# Altium PCB MCH_MAIN.PCBDOC (part 3 of 5)
Units mil, origin at the board's own origin, x right, y up, seen from the top; angles counter-clockwise.
Board outline 7194.88 x 2984.25 mil, 8 copper layers (Top Layer, MidLayer1, MidLayer2, GND, Power, MidLayer3, MidLayer4, Bottom Layer); 584 components, 952 nets, 3896 pads, 365 vias.
Unrouted connection lines stored in the file: 2112.
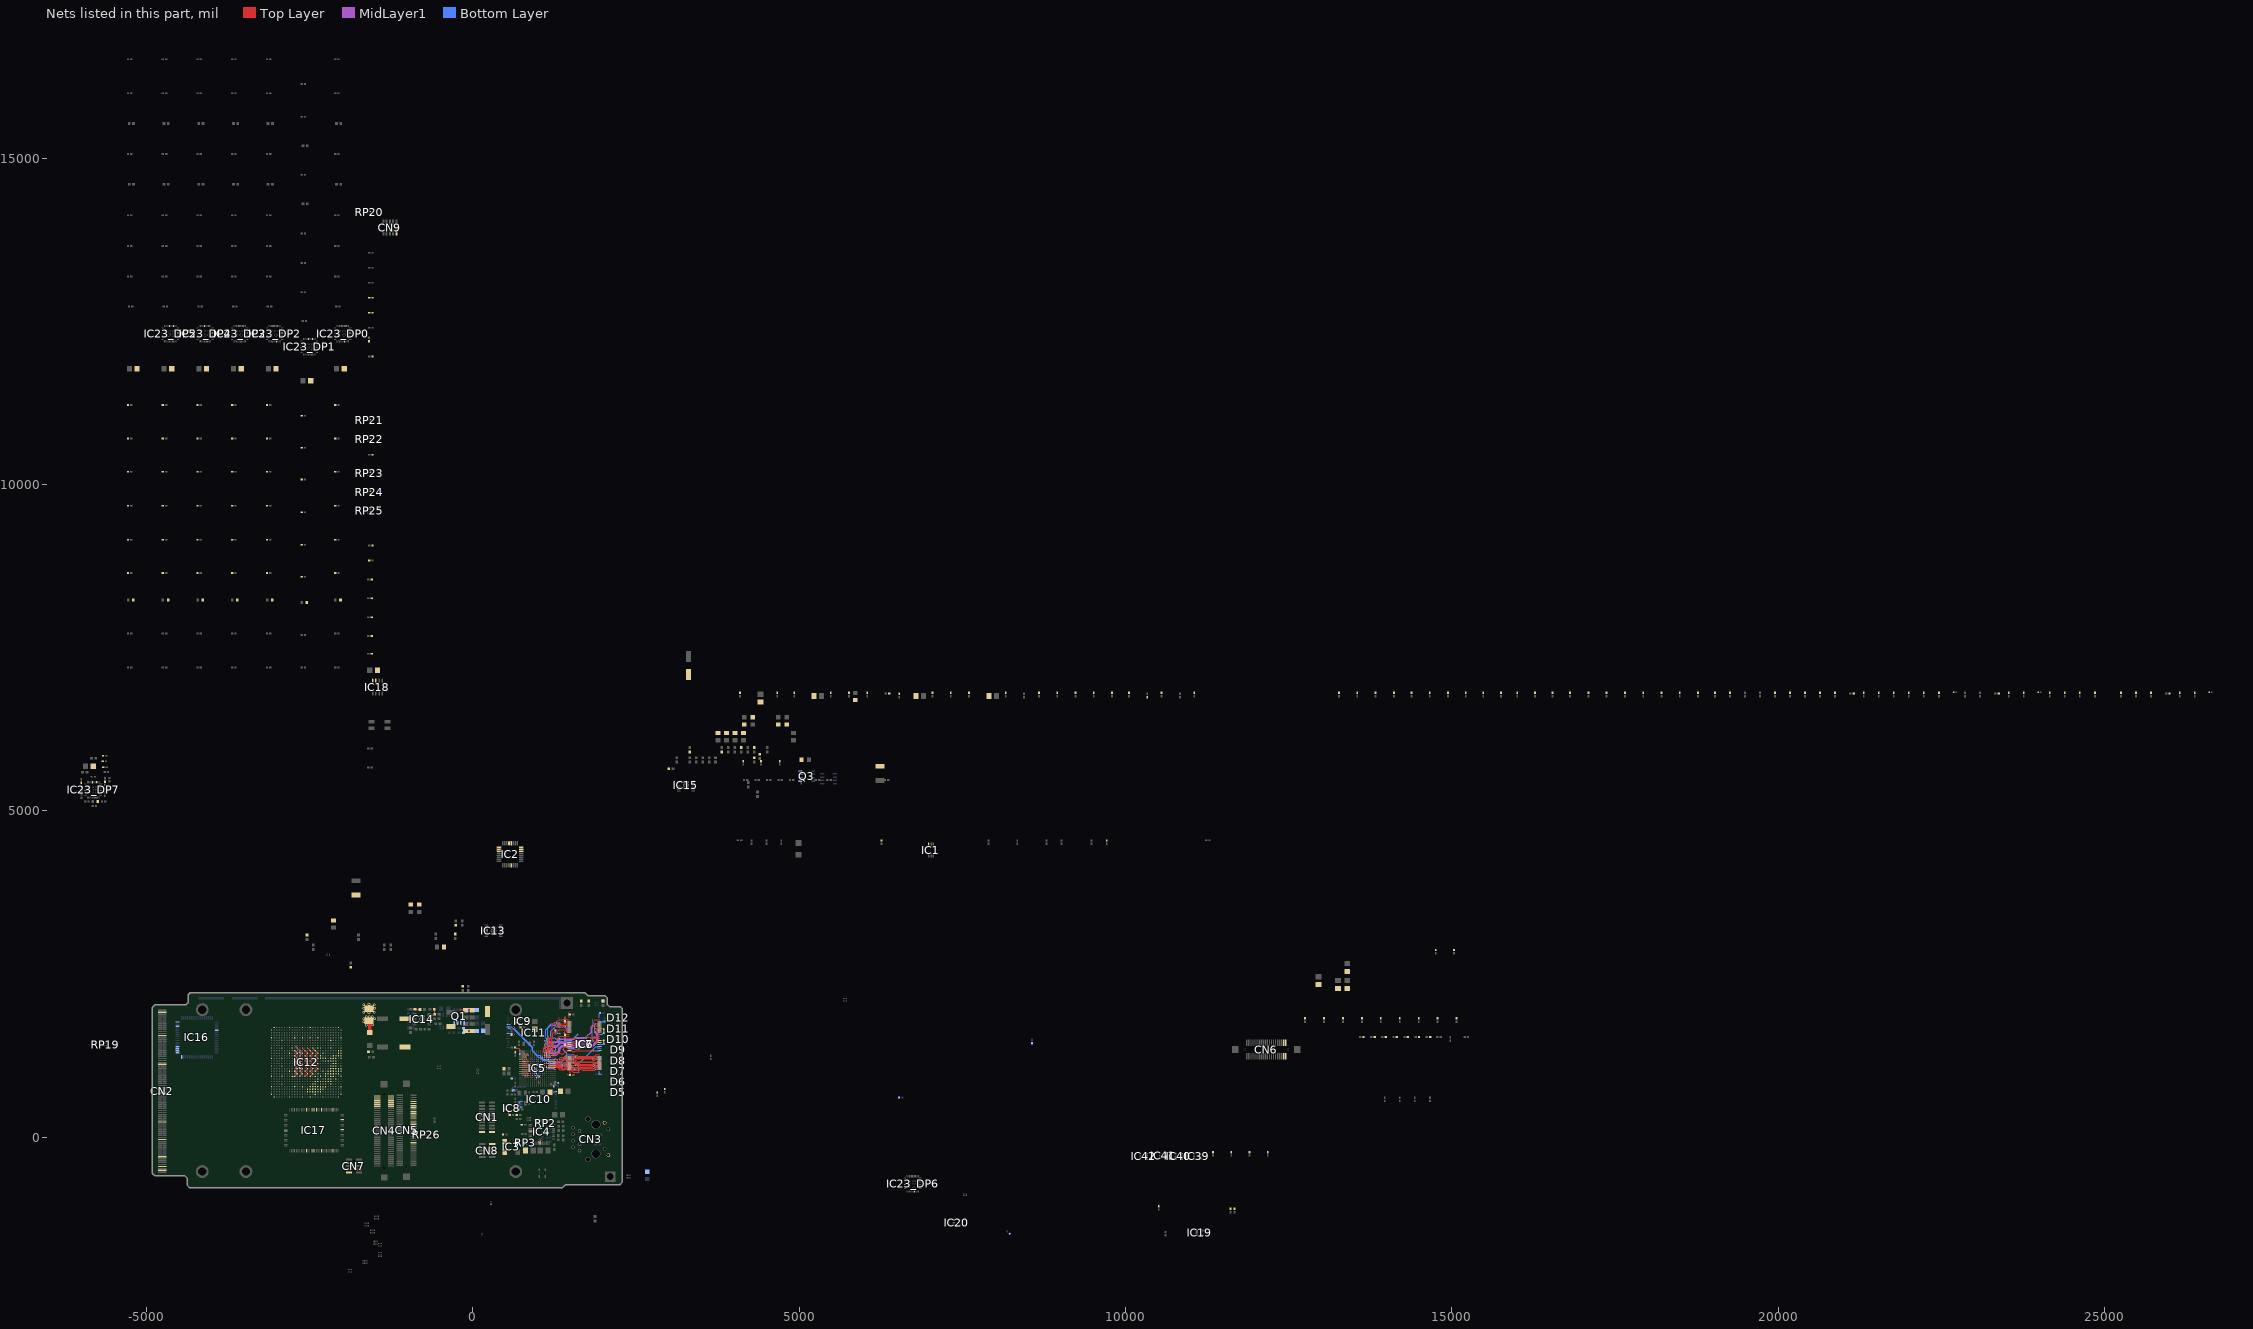
[diagram p6: the nets of this part, all layers, seen from the top]

## Part data
C1 C2 C3 C4 C5 C6 C7 C8 C9 C10 C13 C15 C16 C17 C18 C19 C20 C21 C22 C23 C24 C25 C26 C27 C28 C29 C30 C31 C32 C33 C34 C35 C36 C37 C38 C39 C40 C41 C42 C43 C44 C45 C46 C47 C48 C49 C50 C51 C52 C53 C54 C55 C56 C57 C58 C59 C60 C65 C66 C67 C68 C69 C70 C71 C72 C73 C74 C75 C76 C77 C78 C80 C81 C82 C83 C84 C85 C86 C87 C88 C89 C90 C91 C92 C93 C94 C95 C96 C97 C98 C99 C100 C101 C102 C103 C104 C105 C106 C107 C110 C111 C112 C113 C114 C115 C116 C117 C126 C127 C128 C129 C130 C131 C132 C133 C134 C135 C136 C137 C138 C139 C140 C141 C142 C143 C144 C145 C146 C152 C153 C154 C156 C157 C158 C160 C161 C163 C164 C165 C166 C167 C168 C169 C170 C171 C172 C175 C176 C177 C178 C179 C180 C181 C182 C183 C184 C185 C186 C187 C188 C189 C190 C191 C192 C193 C194 C195 C196 C197 C199 C201 C202 C203 C204 C205 C206 C207 C208 C209 C210 C211 C212 C216 C217 C218 C219 C220 C221 C222 C223 C224 C225 C227 C228 C229 C230 C231 C232 C233 C234 C235 C236 C237 C238 C239 C240 C252: "Capacitor"
C11 C12 C14 C79_DP0 C79_DP1 C79_DP2 C79_DP3 C79_DP4 C79_DP5 C79_DP6 C79_DP7 C147 C155 C159 C162 C226 C241 C242 C243 C244 C245 C246 C247: "Tantallum capacitor"
C61_DP0 C61_DP1 C61_DP2 C61_DP3 C61_DP4 C61_DP5 C61_DP6 C61_DP7 C62_DP0 C62_DP1 C62_DP2 C62_DP3 C62_DP4 C62_DP5 C62_DP6 C62_DP7 C63_DP0 C63_DP1 C63_DP2 C63_DP3 C63_DP4 C63_DP5 C63_DP6 C63_DP7 C64_DP0 C64_DP1 C64_DP2 C64_DP3 C64_DP4 C64_DP5 C64_DP6 C64_DP7 C108_DP0 C108_DP1 C108_DP2 C108_DP3 C108_DP4 C108_DP5 C108_DP6 C108_DP7 C109_DP0 C109_DP1 C109_DP2 C109_DP3 C109_DP4 C109_DP5 C109_DP6 C109_DP7 C118_DP0 C118_DP1 C118_DP2 C118_DP3 C118_DP4 C118_DP5 C118_DP6 C118_DP7 C119_DP0 C119_DP1 C119_DP2 C119_DP3 C119_DP4 C119_DP5 C119_DP6 C119_DP7 C120_DP0 C120_DP1 C120_DP2 C120_DP3 C120_DP4 C120_DP5 C120_DP6 C120_DP7 C121_DP0 C121_DP1 C121_DP2 C121_DP3 C121_DP4 C121_DP5 C121_DP6 C121_DP7 C122_DP0 C122_DP1 C122_DP2 C122_DP3 C122_DP4 C122_DP5 C122_DP6 C122_DP7 C123_DP0 C123_DP1 C123_DP2 C123_DP3 C123_DP4 C123_DP5 C123_DP6 C123_DP7 C124_DP0 C124_DP1 C124_DP2 C124_DP3 C124_DP4 C124_DP5 C124_DP6 C124_DP7 C125_DP0 C125_DP1 C125_DP2 C125_DP3 C125_DP4 C125_DP5 C125_DP6 C125_DP7 C148 C149 C150 C151 C250 C251: library part Cap, "Capacitor"
C213 C214 C215 C249: "Polarized Capacitor (Radial)"
CN1: library part "CONN_2x10 1.27", "1.27 mm dual row goldpin"
CN2: "microTCA MTCA.0 standard MCH connector 1"
CN3: library part ETH_J0011D21BNL, "RJ45 with magnetics and LEDs (Kamami, Kristech,Mouser)"
CN4 CN5: library part KX15_70p, "multipin B2B connector (plug)"
CN6: library part KX15_40p, "multipin B2B connector (plug)"
CN7 CN8 CN9: library part "CONN_2x5 1.27", "1.27 mm dual row goldpin"
CN10: library part "CONN_1x2 1.27", "1.27 mm dual row goldpin"
D1 D2 D3 D4: library part LED0, "Chip LED (any color)"
D5 D6 D7 D8 D9 D10 D11 D12: library part LED_2_colour
D13 D14 D18 D20 D21: "Schottky Diode"
D15 D16 D19: library part LED0, "Red chip LED"
D17: library part D_TRANSIL_SMD_0.6KW, "transil 600W"
F1: "polymer FUSE"
IC1: "ONSemi LVDS/LVPECL -> LVTTL/LVCMOS buffer"
IC2: "1:16 LVCMOS fanout"
IC3: library part OSC_CFPS-73, "SMD oscillator 3.3V (Elfa)"
IC4: library part IFC_DM9161AE, "Davicom 100Mbps ethernet PHY"
IC5: library part AT91SAM9263, "Atmel ARM926 MCU"
IC6 IC7: "Micron 256Mbit PC133 SDRAM w/16-bit data bus"
IC8 IC9: "TI single OR gate"
IC10: "serial data FLASH"
IC11: "256 MByte 8-bit NAND flash"
IC12: library part EP3C120F780C7, "Cyclone III Family FPGA, 531 I/O Pins, 4 PLLs, 780-Pin FBGA, Speed Grade 7, Commercial Grade"
IC13: "National Semiconductor 3A integrated synchronous buck converter"
IC14 IC15: "TI synchronous buck controller"
IC16: "8-Bit AVR Microcontroller with 128K Bytes of In-System Programmable Flash Memory"
IC17: "4.5 Mbit ZBT SRAM"
IC18: library part MEM_24C16, "Serial 16K EEPROM"
IC19: "TTL->LVDS buffer"
IC20: "LVDS->TTL buffer"
IC23_DP0 IC23_DP1 IC23_DP2 IC23_DP3 IC23_DP4 IC23_DP5 IC23_DP6 IC23_DP7: "Texas Instruments Gigabit Ethernet PHY with deterministic clocking and LVPECL output interface"
IC39 IC40 IC41 IC42: "I2C temp. sensor"
L1 L2 L8: library part L_IHLP2525_0.68u, "Vishay 16A 2.2u inductor"
L3 L4 L5_DP0 L5_DP1 L5_DP2 L5_DP3 L5_DP4 L5_DP5 L5_DP6 L5_DP7 L6 L7 L9 L10: "Ferrite bead"
Q1 Q2 Q3 Q4: "18A 8mOhm N-Channel MOSFET"
R1 R2 R3 R4 R5 R6 R7 R8 R9 R10 R11 R12 R13 R14 R15 R16 R17 R18 R19 R20 R21 R22 R23 R24 R25 R26 R27 R28 R29 R30 R31 R32 R33 R34 R35 R36 R37 R38 R39_DP0 R39_DP1 R39_DP2 R39_DP3 R39_DP4 R39_DP5 R39_DP6 R39_DP7 R40_DP0 R40_DP1 R40_DP2 R40_DP3 R40_DP4 R40_DP5 R40_DP6 R40_DP7 R41 R42 R43 R44 R45 R46 R47 R48 R49 R50 R51 R52 R53 R54 R55 R56 R57 R58 R59 R60 R61_DP0 R61_DP1 R61_DP2 R61_DP3 R61_DP4 R61_DP5 R61_DP6 R61_DP7 R62 R63 R64 R65 R66 R67 R68 R69 R70 R71 R72 R73 R74 R75 R76 R77 R78 R79 R80 R81 R82 R83 R84 R85 R86 R87 R88 R89 R90 R91 R92 R93 R94 R95: "Resistor"
RP1 RP2 RP3 RP4 RP5 RP6 RP7 RP8 RP9 RP10 RP11 RP12 RP13 RP14 RP15 RP16 RP17 RP18 RP19 RP20 RP21 RP22 RP23 RP24 RP25 RP26 RP28: library part Res_Pack4, "4-resistor pack"
S1: library part uTCA_HOTSWAP_SWITCH, "Push button"
X1: library part X_CRYSTAL_SMD_ABM8, "Miniature crystal oscillator (ABRACON)"
X2: library part X_CRYSTAL_32k_SMD, "Crystal oscillator"
X3: library part X_CRYSTAL_SMD_ABM3, "Miniature crystal oscillator (ABRACON)"

## Free pads (board coordinates)
  rect 393.7x39.37 smd far side: ESD_STRIP_SEGMENT_1(-4006.3,2130.51) ESD_STRIP_SEGMENT_2(-3494.49,2130.51)
  rect 4685.04x39.37 smd far side: ESD_STRIP_SEGMENT_3(-837.01,2130.51)
  rect 39.37x185.04 smd far side: ESD_STRIP_SEGMENT_3(1338.19,2057.68)
  rect 185.04x185.04 hole 106.3: ESD_STRIP_SEGMENT_3(1446.46,2057.68)
  round 196.85 hole 125.98 unplated: ""(-4144.09,-525) ""(-4144.09,1955.31) ""(-3474.8,-525) ""(-3474.8,1955.31) ""(659.06,-525) ""(659.06,1955.31)
  rect 157.48x157.48 hole 106.3: ""(2105.91,-603.74)

## Via types
v1: diameter 24, hole 8, Top Layer to Bottom Layer, 183 vias
v2: diameter 18, hole 8, Top Layer to Bottom Layer, 150 vias
v3: diameter 40, hole 24, Top Layer to Bottom Layer, 24 vias
v4: diameter 26, hole 10, Top Layer to Bottom Layer, 8 vias

## Nets (pads, with @x,y where several pads share a name; then routed paths per layer and width w, separated by ;. In a path a pad name is that pad's centre, name@x,y a point inside that pad or via, vN(x,y) a via of type N, cw(c..) or ccw(c..) an arc to the next point about the centre after c; other vN are vias at no path point)
+1V2: C37.1 C39.1 C65.2 C66.2 C68.2 C70.2 C72.2 C74.2 C76.2 C77.2 C78.2 C80.2 C81.2 C84.2 C86.2 C88.2 C90.2 C92.2 C94.2 C95.2 C98.2 C99.2 C100.2 C102.2 C104.2 C106.2 C110.2 C111.2 C113.2 C114.2 C116.2 C117.2 C127.2 C128.2 C130.2 C131.2 C132.2 C133.2 C134.2 C136.2 C141.2 C142.2 C143.2 C144.2 C147.1 C155.1 C159.1 C170.2 C171.2 C172.2 C242.1 C243.1 C252.1 IC5.A16 IC5.H10 IC5.V1 IC12.J9 IC12.J20 IC12.K9 IC12.K11 IC12.K13 IC12.K15 IC12.K17 IC12.K19 IC12.L10 IC12.L12 IC12.L14 IC12.L16 IC12.L18 IC12.L20 IC12.M9 IC12.M11 IC12.M13 IC12.M15 IC12.M17 IC12.M19 IC12.N10 IC12.N12 IC12.N14 IC12.N16 IC12.N18 IC12.N20 IC12.P9 IC12.P11 IC12.P13 IC12.P15 IC12.P17 IC12.P19 IC12.R10 IC12.R12 IC12.R14 IC12.R16 IC12.R18 IC12.R20 IC12.T9 IC12.T11 IC12.T13 IC12.T15 IC12.T17 IC12.T19 IC12.U10 IC12.U12 IC12.U14 IC12.U16 IC12.U18 IC12.U20 IC12.V9 IC12.V11 IC12.V13 IC12.V15 IC12.V17 IC12.V19 IC12.W10 IC12.W12 IC12.W14 IC12.W16 IC12.W18 IC12.W20 IC12.Y9 IC12.Y20 IC16.49 L8.2 R62.1 | length 3148
  Top Layer w8: IC12.Y20@-2767.01,933.74 IC12.W20@-2727.64,933.74 IC12.V19@-2688.27,973.11 IC12.W18@-2727.64,1012.48 IC12.V17@-2688.27,1051.85 IC12.W16@-2727.64,1091.22 IC12.V15@-2688.27,1130.59 IC12.W14@-2727.64,1169.96 IC12.V13@-2688.27,1209.33 IC12.W12@-2727.64,1248.7 IC12.V11@-2688.27,1288.07 ; IC12.W10@-2727.64,1322.56 IC12.W10@-2727.64,1327.44 IC12.V11@-2688.27,1288.07 ; IC12.V11@-2691.26,1288.07 IC12.V11@-2688.27,1288.07 ; IC12.V9@-2688.27,1366.81 -2670.08,1348.62 ; -2669.29,1345.47 -2669.29,1349.41 ; -2668.11,1346.65 IC12.T11@-2609.53,1288.07 IC12.U12@-2648.9,1248.7 IC12.T13@-2609.53,1209.33 IC12.U14@-2648.9,1169.96 IC12.T15@-2609.53,1130.59 IC12.U16@-2648.9,1091.22 IC12.T17@-2609.53,1051.85 IC12.U18@-2648.9,1012.48 IC12.T19@-2609.53,973.11 IC12.U20@-2648.9,933.74 ; IC12.T9@-2609.53,1366.81 IC12.R10@-2570.16,1327.44 IC12.P11@-2530.79,1288.07 IC12.R12@-2570.16,1248.7 IC12.P13@-2530.79,1209.33 IC12.R14@-2570.16,1169.96 IC12.P15@-2530.79,1130.59 IC12.R16@-2570.16,1091.22 IC12.P17@-2530.79,1051.85 IC12.R18@-2570.16,1012.48 IC12.P19@-2530.79,973.11 IC12.R20@-2570.16,933.74 ; IC12.P9@-2530.79,1366.81 IC12.N10@-2491.42,1327.44 ; IC12.N20@-2491.42,933.74 IC12.M19@-2452.05,973.11 IC12.N18@-2491.42,1012.48 IC12.M17@-2452.05,1051.85 IC12.N16@-2491.42,1091.22 IC12.M15@-2452.05,1130.59 IC12.N14@-2491.42,1169.96 IC12.M13@-2452.05,1209.33 IC12.N12@-2491.42,1248.7 IC12.M11@-2452.05,1288.07 ; IC12.N10@-2491.42,1322.56 IC12.N10@-2491.42,1327.44 ; IC12.M11@-2455.04,1288.07 IC12.M11@-2452.05,1288.07 ; IC12.M9@-2452.05,1366.81 IC12.L10@-2412.68,1327.44 IC12.K11@-2373.31,1288.07 IC12.L12@-2412.68,1248.7 IC12.K13@-2373.31,1209.33 IC12.L14@-2412.68,1169.96 IC12.K15@-2373.31,1130.59 IC12.L16@-2412.68,1091.22 IC12.K17@-2373.31,1051.85 IC12.L18@-2412.68,1012.48 ; C37.1@646.02,1376.1 652.44,1376.1 665.35,1363.19 704.72,1363.19 723.41,1344.51 IC5.V1@723.41,1321.86 ; IC5.H10@1038.37,1038.39 v2(1054.11,1022.65) ; IC5.A16@1258.84,849.42 v2@1282.47,849.42 ; IC12.N10@-2491.42,1327.44 IC12.M11@-2452.05,1288.07
  Bottom Layer w8: v2(1054.11,1022.65) 1074.81,1022.65 C252.1@1086.61,1034.45
  other v1: -2708.66,993.11 -2629.92,993.11 -2708.66,1069.88 -2629.92,1071.85 -2627.95,1148.62 -2708.66,1150.59 -2627.95,1227.36 -2708.66,1229.33 -2708.66,1308.07 -2627.95,1308.07 -2708.66,1386.81
  other v2: 1283.46,849.41
+2V5: C1.2 C2.2 C3.2 C4.2 C67.2 C69.2 C71.2 C73.2 C75.2 C79_DP0.1 C79_DP1.1 C79_DP2.1 C79_DP3.1 C79_DP4.1 C79_DP5.1 C79_DP6.1 C79_DP7.1 C118_DP0.2 C118_DP1.2 C118_DP2.2 C118_DP3.2 C118_DP4.2 C118_DP5.2 C118_DP6.2 C118_DP7.2 C119_DP0.2 C119_DP1.2 C119_DP2.2 C119_DP3.2 C119_DP4.2 C119_DP5.2 C119_DP6.2 C119_DP7.2 C120_DP0.2 C120_DP1.2 C120_DP2.2 C120_DP3.2 C120_DP4.2 C120_DP5.2 C120_DP6.2 C120_DP7.2 C121_DP0.2 C121_DP1.2 C121_DP2.2 C121_DP3.2 C121_DP4.2 C121_DP5.2 C121_DP6.2 C121_DP7.2 C122_DP0.2 C122_DP1.2 C122_DP2.2 C122_DP3.2 C122_DP4.2 C122_DP5.2 C122_DP6.2 C122_DP7.2 C123_DP0.2 C123_DP1.2 C123_DP2.2 C123_DP3.2 C123_DP4.2 C123_DP5.2 C123_DP6.2 C123_DP7.2 C135.2 C137.2 C138.2 C139.2 C140.2 C145.2 C146.2 C152.2 C153.2 C154.2 C156.2 C157.2 C158.2 C160.2 C161.2 C163.2 C164.2 C165.2 C175.1 C176.1 C177.1 C178.1 C179.1 C183.2 C184.2 C185.2 C186.2 C187.2 C213.1 C244.1 C245.1 CN4.9 CN4.10 CN4.11 CN4.12 IC2.1 IC2.2 IC2.3 IC2.22 IC2.23 IC2.24 IC2.28 IC2.29 IC12.A2 IC12.A5 IC12.A9 IC12.A13 IC12.AA1 IC12.AA11 IC12.AA18 IC12.AD6 IC12.AD9 IC12.AD13 IC12.AD16 IC12.AD20 IC12.AD23 IC12.AG1 IC12.AH2 IC12.AH5 IC12.AH9 IC12.AH13 IC12.AH16 IC12.AH20 IC12.AH24 IC12.AH27 IC12.B1 IC12.E6 IC12.E9 IC12.E13 IC12.H1 IC12.H11 IC12.K5 IC12.N1 IC12.N5 IC12.T1 IC12.T5 IC12.W5 IC16.48 IC23_DP0.6 IC23_DP0.13 IC23_DP0.16 IC23_DP0.26 IC23_DP0.37 IC23_DP1.6 IC23_DP1.13 IC23_DP1.16 IC23_DP1.26 IC23_DP1.37 IC23_DP2.6 IC23_DP2.13 IC23_DP2.16 IC23_DP2.26 IC23_DP2.37 IC23_DP3.6 IC23_DP3.13 IC23_DP3.16 IC23_DP3.26 IC23_DP3.37 IC23_DP4.6 IC23_DP4.13 IC23_DP4.16 IC23_DP4.26 IC23_DP4.37 IC23_DP5.6 IC23_DP5.13 IC23_DP5.16 IC23_DP5.26 IC23_DP5.37 IC23_DP6.6 IC23_DP6.13 IC23_DP6.16 IC23_DP6.26 IC23_DP6.37 IC23_DP7.6 IC23_DP7.13 IC23_DP7.16 IC23_DP7.26 IC23_DP7.37 L1.2 L3.1 L5_DP0.1 L5_DP1.1 L5_DP2.1 L5_DP3.1 L5_DP4.1 L5_DP5.1 L5_DP6.1 L5_DP7.1 L6.1 L7.1 L10.1 R19.1 R21.2 R22.2 R67.1 R68.2 R70.1 | length 285.9
  Top Layer w10: -208.67,1956.91 C176.1@-124.23,1956.91
  Top Layer w32: C185.2@-109.25,1629.92 -107.65,1628.32 C184.2@-10.67,1628.32 ; C176.1@-106.79,1946.35 C175.1@-8.27,1946.35 ; C175.1@-6.89,1946.85 C175.1@-4.28,1944.24
+3V3: C5.2 C6.2 C7.2 C8.1 C14.1 C15.1 C17.1 C19.1 C22.1 C23.1 C24.1 C25.1 C26.1 C28.1 C30.1 C35.1 C42.1 C43.1 C44.1 C45.1 C46.1 C47.1 C48.1 C49.1 C50.1 C51.1 C52.1 C53.1 C54.1 C55.1 C56.1 C57.1 C58.1 C59.1 C60.1 C85.2 C87.2 C89.2 C91.2 C93.2 C101.2 C103.2 C105.2 C107.2 C112.2 C115.2 C126.2 C129.2 C148.2 C149.2 C150.2 C151.2 C162.1 C168.2 C169.2 C201.2 C202.2 C203.2 C204.2 C205.2 C207.1 C208.1 C209.1 C210.1 C211.1 C229.2 C230.2 C231.2 C232.2 C233.2 C234.2 C235.2 C236.2 C237.2 C238.2 C239.2 C240.2 C241.1 C246.1 C247.1 C249.1 C250.2 C251.2 CN1.1 CN1.2 CN3.9 CN3.12 CN4.5 CN4.6 CN4.7 CN4.8 CN6.1 CN6.2 CN6.3 CN6.4 CN7.2 CN8.2 D1.1 D2.1 D3.1 D4.1 D5.3 D6.3 D7.3 D8.3 D9.3 D10.3 D11.3 D12.3 D21.1 IC1.8 IC2.13 IC3.1 IC3.4 IC4.23 IC4.30 IC4.41 IC5.A17 IC5.C17 IC5.H8 IC5.K10 IC5.K12 IC5.L8 IC5.L9 IC5.L10 IC5.L11 IC5.M10 IC5.M13 IC5.T1 IC5.T2 IC6.1 IC6.3 IC6.9 IC6.14 IC6.27 IC6.43 IC6.49 IC7.1 IC7.3 IC7.9 IC7.14 IC7.27 IC7.43 IC7.49 IC8.5 IC9.5 IC10.2 IC10.6 IC10.16 IC11.12 IC11.19 IC11.37 IC12.A16 IC12.A20 IC12.A24 IC12.A27 IC12.AA28 IC12.AG28 IC12.B28 IC12.E16 IC12.E20 IC12.E23 IC12.H18 IC12.H28 IC12.K24 IC12.N24 IC12.N28 IC12.T24 IC12.T28 IC12.W24 IC13.6 IC13.7 IC13.12 IC17.4 IC17.11 IC17.14 IC17.15 IC17.16 IC17.20 IC17.27 IC17.41 IC17.54 IC17.61 IC17.65 IC17.66 IC17.70 IC17.77 IC17.91 IC17.97 IC19.1 IC20.1 IC39.4 IC40.3 IC40.4 IC41.3 IC41.4 IC41.5 IC42.4 IC42.5 L2.2 L9.1 R25.2 R28.1 R32.2 R35.2 R36.2 R37.2 R60.2 R77.1 R78.2 R81.1 R87.1 RP2.1 RP2.2 RP2.3 RP3.1 RP3.2 RP3.3 RP3.4 RP26.5 RP26.6 RP26.7 RP26.8 | length 3392.6
  Top Layer w8: C57.1@490.43,430.51 526.38,430.51 IC8.5@548.19,408.7 548.19,357.76 R35.2@564.84,341.1 ; C60.1@601.69,1574.65 604.49,1571.85 v1(625.98,1571.85) ; C43.1@651.69,1754.65 702.64,1754.65 IC9.5@719.45,1737.83 719.45,1696.89 R36.2@736.1,1680.24 ; C56.1@704.84,426.1 704.84,468.62 708.65,472.43 v1(708.65,468.5) ; v2(770.67,1306.1) IC5.T2@786.4,1290.36 ; IC4.30@881.12,93.94 921.69,93.94 937.01,109.25 v1(937.01,125) ; v2(896.63,928.16) IC5.M13@912.38,943.9 ; IC5.M10@912.38,1038.39 IC5.L10@943.88,1038.39 ; v2(928.13,991.15) IC5.L11@943.88,1006.9 ; v2(928.13,1022.65) IC5.L10@943.88,1038.39 ; v2@928.15,1053.15 943.88,1068.88 IC5.L9@943.88,1069.89 IC5.L9@941.63,1072.14 ; v2@930.09,1085.64 930.09,1082.7 IC5.L9@943.39,1069.4 ; v2@930.09,1087.6 IC5.L8@943.88,1101.39 IC5.L8@941.63,1099.11 ; v2(959.63,959.65) IC5.K12@975.37,975.4 ; IC4.23@968.12,260.94 968.12,228.73 982.28,214.57 v1(1002.95,214.57) ; IC5.K10@975.37,1038.39 IC5.L10@943.88,1038.39 ; IC4.41@1028.12,-93.06 1028.12,-59.48 v1(1055.12,-32.48) ; IC5.H8@1038.37,1101.39 v2(1054.11,1117.13) ; IC5.C17@1195.86,817.92 v2(1211.61,802.17) ; IC5.A17@1258.85,817.92 v2(1274.61,802.17) ; C59.1@1266.69,1635.83 v1(1266.69,1670.31) ; v1(1378.94,1778.54) 1380.04,1779.65 C49.1@1411.69,1779.65 1417.05,1779.65 1429.06,1767.64 1480.65,1767.64 IC6.3@1482.65,1769.64 ; v1(1392.72,1625) 1392.72,1609.25 1411.69,1590.28 C54.1@1411.69,1570.83 ; C54.1@1410.88,1581.64 1407.28,1585.24 1412.85,1579.67 IC6.9@1480.65,1579.67 ; C51.1@1411.69,1419.65 1415.69,1423.64 IC6.14@1486.65,1423.64 ; v1(1455.71,955.71) 1490.63,955.71 1491.1,955.24 1491.1,989.17 1481.93,998.35 1481.93,1011.46 IC6.27@1480.65,1012.74 ; v1@1479.33,1908.46 1480.06,1907.74 1480.06,1834.23 1480.65,1833.64 IC6.1@1480.65,1831.64 ; IC6.14@1480.65,1422.19 1522.58,1422.19 v1@1530.51,1430.12 ; IC6.43@1943.64,1485.18 2001.1,1485.18 C47.1@2006.65,1479.64 ; IC6.49@1943.64,1674.16 1986.13,1674.16 C55.1@2008.65,1651.64
  Bottom Layer w8: IC11.12@541.69,1591.77 606.06,1591.77 v1(625.98,1571.85) ; IC11.19@541.69,1729.57 569.13,1729.57 v1(580.71,1741.14) ; v1(602.36,749.02) 602.36,737.2 617.87,721.69 L9.1@617.87,721.1 ; IC10.2@744.13,461.89 719.21,461.89 709.65,471.46 709.65,536.73 717.72,544.81 717.72,547.28 719.57,549.13 743.51,549.13 IC10.6@744.13,548.5 ; C17.1@921.69,93.43 921.69,109.68 v1(937.01,125) ; v2(928.13,1022.65) 947.84,1022.65 v2@951.77,1026.57 ; v2@928.15,1084.65 928.15,1076.77 C24.1@962.6,1042.32 ; v2@929.13,991.14 952.72,991.14 959.63,984.23 v2(959.63,959.65) 981.29,959.65 1006.89,934.06 C28.1@1007.87,934.06 ; C24.1@959.65,1028.54 C24.1@959.65,1032.48 ; C15.1@971.22,246.32 v1(1002.95,214.57) ; C25.1@990.43,1120.51 990.43,1112.91 1020.67,1082.68 1036.42,1082.68 1053.15,1099.41 v2@1053.15,1117.13 ; C19.1@1022.28,-76.48 1022.28,-74.8 1045.06,-52.02 1045.06,-48.02 1045.06,-42.54 v1(1055.12,-32.48) ; RP2.1@1087.6,188.9 RP2.2@1087.6,208.58 RP2.3@1087.6,228.27 ; v1(1242.13,700.79) 1242.84,700.08 IC10.16@1271.69,700.08 ; v1@1266.73,1671.26 1266.73,1617.13 1292.09,1591.77 IC11.37@1321.22,1591.77 ; v1(1363.19,1676.18) 1391.65,1704.65 C46.1@1411.69,1704.65 ; C46.1@1411.69,1714.65 1411.69,1692.64 1430.17,1674.16 IC7.49@1477.65,1674.16 IC7.49@1452.18,1674.16 ; C52.1@1416.69,1494.65 1426.16,1485.18 IC7.43@1477.65,1485.18 1516.68,1485.18 1609.25,1577.76 v1(1609.25,1581.69) ; IC7.3@1934.06,1769.68 1996.06,1769.68 2000.79,1774.41 C44.1@2020,1774.41 ; IC7.27@1940.65,1012.74 1940.65,966.87 C42.1@1942.28,965.24 1977.05,965.24 v1(1977.36,965.55) ; IC7.14@1940.65,1422.19 2001.91,1422.19 C50.1@2008.86,1429.13 ; IC7.9@1940.65,1579.67 1985.18,1579.67 C45.1@2001.97,1596.46 ; IC7.1@1940.65,1831.64 1940.65,1896.35 C53.1@1953.74,1909.45
  other v1: 1534.45,1428.15 1477.36,1912.4
  other v2: 959.63,1022.65 929.11,1054.14 928.13,1085.64
+3V3_MP: C221.1 C222.1 C223.1 C224.1 C225.1 C226.1 CN2.4 CN9.2 IC16.21 IC16.52 IC16.62 IC16.64 IC18.7 IC18.8 R48.2 R92.1 R93.1 R94.2 RP19.1 RP19.2 RP19.3 RP19.4 RP20.1 RP20.2 RP20.3 RP20.4 RP21.1 RP21.2 RP21.3 RP21.4 RP22.1 RP22.2 RP22.3 RP22.4 RP23.1 RP23.2 RP23.3 RP23.4 RP24.1 RP24.2 RP24.3 RP24.4 RP25.1 RP25.2 RP25.3 RP25.4
+12V_BACKPLANE: CN2.2 CN2.9 CN2.18 CN2.27 CN2.42 CN2.57 CN2.72 CN2.84 F1.1
  other v3: -1589.57,1909.45 -1670.28,1915.35 -1506.89,1916.34 -1671.26,1975.39 -1504.92,1975.39 -1667.32,2030.51 -1506.89,2032.48 -1589.57,2036.42
+12V_BULK: C166.2 C167.2 C196.2 C197.2 C199.1 C214.1 C215.1 CN4.1 CN4.2 CN4.3 CN4.4 D17.K F1.2 IC14.15 IC15.15 Q1.5 Q1.6 Q1.7 Q1.8 Q3.5 Q3.6 Q3.7 Q3.8 R58.1 R59.2 R72.1 R73.2 R74.2 R86.1 | length 434.8
  Top Layer w12: R59.2@-884.19,1958.56 -809.16,1958.56 -809.06,1958.66 R58.1@-808.07,1958.66 ; IC14.15@-668.42,1874.54 -591.02,1874.54 C167.2@-579.72,1885.83 ; C166.2@-593.5,1956.69 -583.46,1946.65 C167.2@-583.46,1886
  Top Layer w50: F1.2@-1592.52,1789.37 -1579,1775.85 D17.K@-1579,1606.39
  Bottom Layer w12: -370.38,1952.46 -369.09,1953.74
  other v3: -1631.89,1720.47 -1529.53,1721.46 -1673.23,1767.72 -1503.94,1814.96 -1673.23,1816.93 -1630.91,1848.43 -1586.61,1849.41 -1541.34,1849.41
A0: IC5.E9 IC6.15 | length 702
  Top Layer w5: v1(1376.9,1351.72) 1415.88,1390.69 IC6.15@1480.65,1390.69
  Top Layer w8: IC5.E9@1132.85,1069.89 v2(1148.6,1085.64)
  MidLayer1 w5: v2(1148.6,1085.64) 1168.3,1065.94 1233.27,1065.94 1252.95,1085.63 1317.91,1085.63 1375,1142.72 1426.2,1142.72 1441.74,1158.26 1441.74,1286.88 v1(1376.9,1351.72)
A1: IC5.A9 IC7.15 | length 952.6
  Top Layer w5: IC5.A9@1258.84,1069.89 1302.16,1069.89 1335.6,1036.44 1412.41,1036.44 1416.14,1040.17 1437.75,1040.17 1451.77,1026.15 1509.82,1026.15 1536.95,999.02 v1(1625,999.02)
  Bottom Layer w5: v1(1625,999.02) 1625,1128.95 1886.74,1390.69 IC7.15@1940.65,1390.69
A2: IC5.D9 IC6.23 IC7.23 | length 828.7
  Top Layer w5: v1(1388.78,1107.28) 1408.28,1126.78 1434.38,1126.78 1446.32,1138.73 IC6.23@1480.65,1138.73 ; IC6.23@1480.59,1138.78 IC6.23@1480.65,1138.73 ; v1@1847.44,1138.78 1838.01,1148.22 1556.42,1148.22 1546.41,1158.23 1530.25,1158.23 1510.75,1138.73 IC6.23@1480.65,1138.73
  Top Layer w8: IC5.D9@1164.35,1069.89 1175.6,1081.13 v2(1180.12,1085.63)
  Bottom Layer w5: v2@1183.76,1081.13 v2(1180.12,1085.63) 1195.63,1101.14 1382.63,1101.14 v1(1388.78,1107.28) ; v1(1845.53,1138.73) IC7.23@1940.65,1138.73
A3: IC5.C9 IC6.24 IC7.24 | length 778.3
  Top Layer w5: v1(1420.28,1107.28) 1480.59,1107.28 IC6.24@1480.65,1107.23 ; IC6.24@1493.11,1107.28 1561.99,1107.28 1581.44,1126.73 1609.01,1126.73 1626.52,1109.23 1877,1109.23 v1(1878.99,1107.23)
  Top Layer w8: IC5.C9@1195.85,1069.89 v2(1211.6,1085.64)
  Bottom Layer w5: v2@1213.58,1082.57 v2@1213.58,1085.63 ; v2@1214.75,1085.64 v2(1211.6,1085.64) 1412.41,1085.64 1420.28,1093.5 v1(1420.28,1107.28) ; v1(1878.99,1107.23) IC7.24@1940.65,1107.23
A4: IC5.B9 IC6.25 IC7.25 | length 737.7
  Top Layer w5: IC5.B9@1229.09,1069.89 1227.37,1069.89 1242.74,1085.26 1314.53,1085.26 1333.75,1066.04 1350.92,1066.04 1370.52,1046.44 1404.73,1046.44 1434.02,1075.73 IC6.25@1480.65,1075.73 ; IC6.25@1508.73,1075.79 1528.29,1056.23 1544.44,1056.23 1553.94,1065.73 1842.12,1065.73 v1(1845.68,1069.29)
  Bottom Layer w5: v1(1845.68,1069.29) 1852.12,1075.73 IC7.25@1940.65,1075.73
A5: IC5.A8 IC6.26 IC7.26 | length 909.3
  Top Layer w5: IC5.A8@1258.84,1101.39 1329.72,1101.39 1365.16,1065.94 v1(1388.78,1065.94) ; IC6.26@1481.3,1044.29 1483.27,1042.32 1522.64,1042.32 1540.17,1024.79 1867.42,1024.79 v1(1886.87,1044.24)
  MidLayer1 w5: v1(1388.78,1065.94) 1518.57,1065.94 1528.29,1056.23 1562.44,1056.23 1569.99,1063.79 1593.71,1063.79 1615.34,1063.79 v1(1654.53,1024.61)
  Bottom Layer w5: v1(1886.87,1044.24) IC7.26@1940.65,1044.24
A6: IC5.F9 IC6.29 IC7.29 | length 1001.1
  Top Layer w5: v1@1586.61,1043.31 1593.1,1049.79 1860.57,1049.79 1874.52,1063.74 1906.37,1063.74 1925.87,1044.24 IC6.29@1943.64,1044.24
  Top Layer w8: IC5.F9@1101.36,1069.89 v2(1117.11,1085.64)
  MidLayer1 w5: v2(1117.11,1085.64) 1126.68,1085.64 1156.22,1056.1 1250.73,1056.1 1264.76,1070.14 1347.19,1070.14 1373.03,1044.29 v1(1585.63,1044.29)
  Bottom Layer w5: IC7.29@1477.65,1044.24 1585.57,1044.24 v1(1585.63,1044.29)
A7: IC5.B8 IC6.30 IC7.30 | length 811.7
  Top Layer w5: IC5.B8@1227.34,1101.39 1244.47,1118.51 1332.28,1118.51 1363,1087.78 1428.35,1087.78 1429.71,1089.14 1522.96,1089.14 v1(1536.36,1075.73) 1812.43,1075.73 1825.49,1088.79 1855.71,1088.79 1868.71,1075.79 IC6.30@1943.64,1075.79
  Bottom Layer w5: IC7.30@1477.65,1075.73 v1(1536.36,1075.73)
A8: IC5.C8 IC6.31 IC7.31 | length 782
  Top Layer w5: IC5.C8@1195.85,1101.39 v2@1211.22,1116.76 ; v1(1589.51,1107.23) 1597.52,1099.23 1859.42,1099.23 1870.91,1087.73 1898.49,1087.73 1917.99,1107.23 IC6.31@1943.64,1107.23
  Bottom Layer w5: v2(1211.6,1117.13) 1371.05,1117.13 1380.7,1126.78 1428.35,1126.78 1447.91,1107.23 IC7.31@1477.65,1107.23 v1(1589.51,1107.23)
A9: IC5.D8 IC6.32 IC7.32 | length 808.8
  Top Layer w5: v1@1542.4,1136.73 1613.15,1136.73 1630.66,1119.23 1853.6,1119.23 1872.59,1138.22 1943.13,1138.22 IC6.32@1943.64,1138.73
  Top Layer w8: IC5.D8@1164.35,1101.39 v2(1180.1,1117.13)
  Bottom Layer w5: v2(1180.1,1117.13) 1189.67,1117.13 1205.17,1132.63 1348.79,1132.63 1352.94,1136.78 1412.4,1136.78 1414.34,1138.73 IC7.32@1477.65,1138.73 ; IC7.32@1475.71,1136.78 IC7.32@1477.65,1138.73 ; v1(1538.33,1138.73) IC7.32@1477.65,1138.73
A10: IC5.A7 IC6.33 IC7.33 | length 827.6
  Top Layer w5: IC5.A7@1258.84,1132.88 1363.18,1132.88 1367.08,1136.78 1430.24,1136.78 1447.83,1154.38 1507.38,1154.38 1521.23,1168.23 1585.55,1168.23 v1(1587.54,1170.22) v1@1587.6,1170.28 ; v1@1587.6,1168.31 1597.68,1158.23 1863.61,1158.23 1873.62,1148.22 1902.58,1148.22 1924.59,1170.22 IC6.33@1943.64,1170.22
  Bottom Layer w5: IC7.33@1477.65,1170.22 v1(1587.54,1170.22)
A11: IC5.A6 IC6.34 IC7.34 | length 778.5
  Top Layer w5: IC5.A6@1258.84,1164.38 1284.44,1164.38 1290.35,1158.46 1347.46,1158.46 1376.99,1187.99 1447.98,1187.99 1448.22,1188.23 1526.81,1188.23 v1(1538.39,1199.8) ; v1@1540.35,1199.8 1540.44,1199.72 1823.88,1199.72 1841.39,1182.22 1868.96,1182.22 1888.46,1201.72 IC6.34@1943.64,1201.72
  Bottom Layer w5: IC7.34@1477.65,1201.72 v1@1538.39,1201.72
A12: IC5.F8
A13: IC5.C7 IC6.35 IC7.35 | length 803.9
  Top Layer w5: v1(1579.93,1230.71) 1585.43,1225.21 1859.42,1225.21 1872.83,1211.8 1888.98,1211.8 1910.43,1233.25 IC6.35@1941.91,1233.25
  Top Layer w8: IC5.C7@1195.85,1132.88 v2(1211.6,1148.63)
  Bottom Layer w5: v2(1211.6,1148.63) 1211.76,1148.46 1357.18,1148.46 1441.93,1233.21 IC7.35@1477.65,1233.21 ; IC7.35@1479.33,1233.27 1577.37,1233.27 v1(1579.93,1230.71)
A14: IC5.E7 IC6.36 IC7.36 | length 882.2
  Top Layer w5: v1@1544.91,1260.21 1592.15,1260.21 1607.15,1245.21 1865.52,1245.21 1885.02,1264.71 IC6.36@1943.64,1264.71
  Top Layer w8: IC5.E7@1132.85,1132.88 v2(1148.6,1148.63)
  Bottom Layer w5: v2(1148.6,1148.63) 1188,1148.63 1203.74,1164.37 1296.26,1164.37 1302.17,1158.46 1347.46,1158.46 1406.5,1217.5 1406.5,1231.3 1439.91,1264.71 IC7.36@1477.65,1264.71 v1@1534.5,1264.71
  other v1: 1536.62,1262.2
A15: IC5.B7
A16: IC5.F7 IC6.20 IC7.20 | length 943
  Top Layer w5: v1@1308.07,1180.12 1351.38,1223.43 1408.46,1223.43 1418.25,1233.21 IC6.20@1480.65,1233.21 ; IC6.20@1479.33,1233.27 1554.91,1233.27 1571.85,1250.21 1588.01,1250.21 1603.01,1235.21 1877,1235.21 v1(1880.91,1231.3)
  Top Layer w8: IC5.F7@1101.36,1132.88 v2(1117.11,1148.63)
  MidLayer1 w5: v2(1117.11,1148.63) 1126.68,1148.63 1142.18,1133.13 1263.05,1133.13 v1@1312.01,1182.09
  Bottom Layer w5: v1@1880.91,1229.33 1884.79,1233.21 IC7.20@1940.65,1233.21 IC7.20@1967.47,1233.21
  other v1: 1313.98,1180.12
A17: IC5.D6 IC6.21 IC7.21 | length 817.3
  Top Layer w5: v1(1347.44,1186.02) 1363.13,1201.72 IC6.21@1480.65,1201.72 ; IC6.21@1483.27,1201.77 1485.24,1199.8 1512.8,1199.8 1518.89,1205.89 1518.89,1207.88 1530.31,1219.3 1557.89,1219.3 1567.47,1209.72 1841.46,1209.72 v1(1849.46,1201.72)
  Top Layer w8: IC5.D6@1164.35,1164.38 v2(1180.1,1180.13)
  MidLayer1 w5: v2(1180.1,1180.13) 1195.6,1195.63 1301.91,1195.63 1305.9,1199.62 1334.83,1199.62 v1@1347.44,1187.01
  Bottom Layer w5: v1(1849.46,1201.72) IC7.21@1940.65,1201.72
A18: IC5.D7
A19: IC5.A5
A20: IC5.D5
A21: IC5.C6 IC11.17 | length 944
  Top Layer w8: IC5.C6@1195.85,1164.38 v2(1211.6,1180.13)
  Bottom Layer w5: IC11.17@541.69,1690.2 591.28,1690.2 909.93,1371.55 ; 909.45,1371.06 909.45,1324.8 1006.63,1227.62 1028.54,1227.62 1073.09,1183.07 1152.56,1183.07 1171,1164.63 ; 1171.26,1164.37 1171,1164.63 ; v2(1211.6,1180.13) 1202.01,1180.12 1186.52,1164.63 1171,1164.63
A22: IC5.B6 IC11.16 | length 986
  Top Layer w5: v1(584.65,1665.35) 610.24,1665.35 v1(626.97,1682.09) ; IC5.B6@1227.34,1164.38 IC5.B6@1228.35,1164.38
  Top Layer w8: IC5.B6@1228.35,1164.38 v2(1243.09,1179.14)
  Bottom Layer w5: IC11.16@541.69,1670.51 578.5,1670.51 v1@584.65,1664.37 ; v1(626.97,1682.09) 626.97,1672.23 920.28,1378.92 920.28,1328.74 989.9,1259.11 1031.75,1259.11 1041.34,1249.53 ; 1041.34,1250 1041.34,1249.53 ; 1115.16,1195.87 1114.9,1196.12 1079.19,1196.12 1041.34,1233.97 1041.34,1249.53 ; 1115.16,1196.12 1221.2,1196.12 1238.18,1179.14 v2(1243.09,1179.14)
ADC_3V3: IC16.50 R87.2 R91.1
ADC_12V: IC16.51 R86.2 R90.1
AUX0: IC12.H14
AUX1: IC12.F14
AUX2: IC12.J13
AUX3: IC12.J12
AUX4: IC12.G14
AUX5: IC12.B10
AUX6: IC12.G13
AUX7: IC12.H13
CAS: IC5.B3 IC6.17 IC7.17 | length 787.8
  Top Layer w5: IC5.B3@1227.34,1258.87 1228.09,1258.87 1242.47,1273.24 1277.18,1273.24 1290.48,1286.55 1349.53,1286.55 1362.92,1273.16 1379.07,1273.16 1428.94,1323.03 ; 1429.13,1322.83 1434,1327.7 IC6.17@1480.65,1327.7 ; IC6.17@1475.39,1329.72 1510.83,1329.72 1520.85,1319.7 1532.28,1308.26 1551.99,1308.26 1571.43,1327.7 1779.84,1327.7 1782.07,1325.47 1840,1325.47 1842.22,1327.7 1851.43,1327.7 v1(1855.31,1323.82)
  Bottom Layer w5: v1(1855.31,1323.82) 1851.43,1327.7 IC7.17@1940.65,1327.7
CLKB_FPGA_DIN: CN5.47 R42.2
CMI_CLKSRC0: CN5.19 IC12.C13
CMI_CLKSRC1: CN5.17 IC12.D14
CMI_IRQ0: CN5.23 IC12.E14
CMI_IRQ1: CN5.21 IC12.D13
CMI_PIO0: CN5.13 IC12.B12
CMI_PIO1: CN5.11 IC12.A11
CMI_PIO2: CN5.9 IC12.C14
CMI_PIO3: CN5.7 IC12.A12
CMI_SPI_CS: CN5.27 IC12.C12
CMI_SPI_SCLK: CN5.33 IC12.D12
CMI_SPI_SDIN: CN5.31 IC12.B11
CMI_SPI_SDOUT: CN5.29 IC12.A10
CPU_A0: IC5.U6 IC12.B18
CPU_A1: IC5.V5 IC12.K26
CPU_A2: IC5.R6 IC12.B17 | length 22.3
  Top Layer w8: v2(802.15,1180.13) IC5.R6@817.89,1164.38
CPU_A3: IC5.V6 IC12.A17
CPU_A4: IC5.P8 IC12.N26 | length 22.3
  Top Layer w8: v2(833.64,1117.13) IC5.P8@849.39,1101.39
CPU_A5: IC5.U7 IC12.G22
CPU_A6: IC5.N7 IC12.J22 | length 22.3
  Top Layer w8: v2(865.14,1148.63) IC5.N7@880.89,1132.88
CPU_A7: IC5.T7 IC12.F21 | length 22.3
  Top Layer w8: v2(770.65,1148.63) IC5.T7@786.4,1132.88
CPU_A8: IC5.P7 IC12.J23 | length 22.3
  Top Layer w8: v2(833.64,1148.63) IC5.P7@849.39,1132.88
CPU_A9: IC5.V7 IC12.C19
CPU_A10: IC5.U8 IC12.D19
CPU_A11: IC5.N8 IC12.F19 | length 22.3
  Top Layer w8: v2(865.14,1117.13) IC5.N8@880.89,1101.39
CPU_A12: IC5.T8 IC12.L25 | length 22.3
  Top Layer w8: v2(770.65,1117.13) IC5.T8@786.4,1101.39
CPU_A13: IC5.R8 IC12.G21 | length 22.3
  Top Layer w8: v2(802.15,1117.13) IC5.R8@817.89,1101.39
CPU_A14: IC5.R7 IC12.H22 | length 22.3
  Top Layer w8: v2(802.15,1148.63) IC5.R7@817.89,1132.88
CPU_A15: IC5.V8 IC12.J24
CPU_A16: IC5.U9 IC12.M26
CPU_A17: IC5.R9 IC12.D17 | length 22.3
  Top Layer w8: v2(802.15,1085.64) IC5.R9@817.89,1069.89
CPU_A18: IC5.T9 IC12.E19 | length 22.3
  Top Layer w8: v2(770.65,1085.64) IC5.T9@786.4,1069.89
CPU_A19: IC5.P9 IC12.H21 | length 22.3
  Top Layer w8: v2(833.64,1085.64) IC5.P9@849.39,1069.89
CPU_A20: IC5.V9 IC12.H23
CPU_CS: IC5.P10 IC12.K22 | length 22.3
  Top Layer w8: v2(833.64,1022.65) IC5.P10@849.39,1038.39
CPU_D0: IC5.T10 IC12.L24 | length 22.3
  Top Layer w8: v2(770.65,1022.65) IC5.T10@786.4,1038.39
CPU_D1: IC5.R10 IC12.E18 | length 22.3
  Top Layer w8: v2(802.15,1022.65) IC5.R10@817.89,1038.39
CPU_D2: IC5.N10 IC12.L23 | length 22.3
  Top Layer w8: v2(865.14,1022.65) IC5.N10@880.89,1038.39
CPU_D3: IC5.U11 IC12.M25
CPU_D4: IC5.P12 IC12.C15 | length 22.3
  Top Layer w8: v2(833.64,959.65) IC5.P12@849.39,975.4
CPU_D5: IC5.V11 IC12.C17
CPU_D6: IC5.N11 IC12.G19 | length 22.3
  Top Layer w8: v2(865.14,991.15) IC5.N11@880.89,1006.9
CPU_D7: IC5.T11 IC12.N25 | length 22.3
  Top Layer w8: v2(770.65,991.15) IC5.T11@786.4,1006.9
CPU_D8: IC5.R11 IC12.P26 | length 22.3
  Top Layer w8: v2(802.15,991.15) IC5.R11@817.89,1006.9
CPU_D9: IC5.N12 IC12.P25 | length 22.3
  Top Layer w8: v2(865.14,959.65) IC5.N12@880.89,975.4
CPU_D10: IC5.P13 IC12.K21 | length 22.3
  Top Layer w8: v2(833.64,928.16) IC5.P13@849.39,943.9
CPU_D11: IC5.V12 IC12.G20
CPU_D12: IC5.R12 IC12.D16 | length 22.3
  Top Layer w8: v2(802.15,959.65) IC5.R12@817.89,975.4
CPU_D13: IC5.U12 IC12.C16
CPU_D14: IC5.T12 IC12.E17 | length 22.3
  Top Layer w8: v2(770.65,959.65) IC5.T12@786.4,975.4
CPU_D15: IC5.R13 IC12.F18 | length 22.3
  Top Layer w8: v2(802.15,928.16) IC5.R13@817.89,943.9
CPU_D16: IC5.P3 IC12.L27 | length 22.3
  Top Layer w8: v2(833.64,1274.61) IC5.P3@849.39,1258.87
CPU_D17: IC5.U1 IC12.C21
CPU_D18: IC5.R3 IC12.F22 | length 22.3
  Top Layer w8: v2(802.15,1274.61) IC5.R3@817.89,1258.87
CPU_D19: IC5.T3 IC12.B19 | length 22.3
  Top Layer w8: v2(770.65,1274.61) IC5.T3@786.4,1258.87
CPU_D20: IC5.U2 IC12.E22
CPU_D21: IC5.T4 IC12.D20 | length 22.3
  Top Layer w8: v2(770.65,1243.12) IC5.T4@786.4,1227.37
CPU_D22: IC5.V2 IC12.J26
CPU_D23: IC5.U3 IC12.A18
CPU_D24: IC5.U4 IC12.J25
CPU_D25: IC5.R4 IC12.G23 | length 22.3
  Top Layer w8: v2(802.15,1243.12) IC5.R4@817.89,1227.37
CPU_D26: IC5.T5 IC12.H24 | length 22.3
  Top Layer w8: v2(770.65,1211.62) IC5.T5@786.4,1195.87
CPU_D27: IC5.V3 IC12.G24
CPU_D28: IC5.U5 IC12.E21
CPU_D29: IC5.V4 IC12.H25
CPU_D30: IC5.R5 IC12.L26 | length 22.3
  Top Layer w8: v2(802.15,1211.62) IC5.R5@817.89,1195.87
CPU_D31: IC5.T6 IC12.K25 | length 22.3
  Top Layer w8: v2(770.65,1180.13) IC5.T6@786.4,1164.38
CPU_DMARQ: IC5.J16 IC12.D15 | length 22.3
  Top Layer w8: IC5.J16@1006.87,849.42 v2(1022.62,833.67)
CPU_IRQ0: IC5.K14 IC12.L22 | length 22.3
  Top Layer w8: v2(959.63,896.66) IC5.K14@975.37,912.41
CPU_IRQ1: IC5.A10 IC12.M23
CPU_NWAIT: IC5.P6 IC12.C18 | length 22.3
  Top Layer w8: v2(833.64,1180.13) IC5.P6@849.39,1164.38
CPU_RD: IC5.U10 IC12.D18
CPU_WR: IC5.P11 IC12.M24 | length 22.3
  Top Layer w8: v2(833.64,991.15) IC5.P11@849.39,1006.9
D0: IC5.C2 IC6.2 IC11.29 | length 845.2
  Top Layer w5: IC5.C2@1195.85,1290.36 1181.47,1304.74 1181.47,1370.85 1186.75,1376.13 1186.75,1467.05 1175.31,1478.49 1175.31,1494.65 1203.83,1523.17 1204.85,1523.17 1216.27,1534.6 1216.27,1726.12 1225.39,1735.24 ; 1225.21,1735.5 1254.47,1764.76 v1(1276.57,1764.76) 1315.94,1804.13 1382.87,1804.13 1383.6,1804.86 1443.06,1804.86 1447.78,1800.14 IC6.2@1480.65,1800.14 1480.59,1800.2 IC6.2@1451.77,1800.2
  Bottom Layer w5: v1(1276.57,1764.76) 1279.21,1764.76 1294.73,1749.25 IC11.29@1321.22,1749.25
D1: IC5.D4 IC6.4 IC11.30 | length 999.7
  Top Layer w5: v1@1254.92,1741.14 1256.89,1743.11 1286.72,1743.11 1292.74,1737.09 1480.59,1737.09 IC6.4@1480.65,1737.15
  Top Layer w8: IC5.D4@1164.35,1227.37 v2(1180.1,1243.12)
  Bottom Layer w5: 1117.13,1573.82 1108.45,1565.15 1108.45,1532.28 1119.88,1520.85 1127.17,1520.85 1133.03,1515 1133.03,1477.57 1186.62,1423.98 1202.3,1423.98 1235.96,1390.31 1235.96,1369.24 1180.1,1313.37 v2(1180.1,1243.12) ; 1117.31,1573.82 1117.31,1651.14 1205.71,1739.53 v1(1256.82,1739.53) ; v1@1254.92,1741.14 1255.1,1741.32 1288.52,1741.32 1300.27,1729.57 IC11.30@1321.22,1729.57
D2: IC5.A1 IC6.5 IC11.31 | length 819.1
  Top Layer w5: IC5.A1@1258.84,1321.86 1258.84,1326.18 v1(1272.57,1339.91) ; v1(1280.44,1721.82) 1284.74,1717.52 1436.02,1717.52 1447.83,1705.71 IC6.5@1480.65,1705.66 ; IC6.5@1480.65,1705.66 IC6.5@1480.65,1705.66 IC6.5@1480.65,1705.66
  Bottom Layer w5: v1(1272.57,1339.91) 1270.6,1341.88 1270.6,1385.44 1212.07,1443.98 1194.91,1443.98 1153.03,1485.85 1153.03,1525.22 1147.75,1530.51 1147.75,1667.43 1159.45,1679.13 1197.83,1717.52 1276.14,1717.52 v1(1280.44,1721.82) ; v1@1280.51,1717.52 1283.46,1717.52 1289.2,1711.79 1294.42,1711.79 1296.33,1709.88 IC11.31@1321.22,1709.88
D3: IC5.D2 IC6.7 IC11.32 | length 758.2
  Top Layer w5: IC5.D2@1164.35,1290.36 1149.98,1304.74 1149.98,1348.78 1150.41,1349.21 1150.41,1373.47 1147.75,1376.13 1147.75,1392.28 1165.31,1409.84 1165.31,1498.79 1196.77,1530.26 v1@1196.77,1542.67 ; v1(1286.35,1692.29) 1289.74,1695.68 1402.76,1695.68 1455.78,1642.66 IC6.7@1480.65,1642.66 IC6.7@1480.65,1642.66 IC6.7@1461.61,1642.72
  Bottom Layer w5: v1@1196.85,1541.34 1196.85,1628.05 1261.09,1692.29 v1(1286.35,1692.29) ; v1@1282.48,1689.96 1320.98,1689.96 IC11.32@1321.22,1690.2
  other v1: 1195.87,1547.24
D4: IC5.B1 IC6.8 IC11.41 | length 722.3
  Top Layer w5: v1@1217.52,1503.94 1219.23,1502.23 1219.23,1407.04 1235.96,1390.31 ; v1@1218.5,1505.91 1218.5,1522.68 1226.27,1530.46 1226.27,1590.45 1246.44,1610.61 1292.7,1610.61 1326.59,1644.5 1422.45,1644.5 1441.74,1625.2 1441.74,1619.28 1449.86,1611.17 IC6.8@1480.65,1611.17 IC6.8@1455.78,1611.17 ; IC5.B1@1227.34,1321.86 1227.34,1360.62 1235.96,1369.24 1235.96,1388.14 ; 1234.5,1391.77 1235.96,1390.31 ; 1235.96,1388.14 1235.96,1390.31 ; 1235.96,1388.14 1235.96,1390.31
  Bottom Layer w5: v1@1218.43,1505.27 1237.93,1524.77 1256.99,1524.77 1270.39,1511.36 1319.55,1511.36 IC11.41@1321.22,1513.03 ; v1@1225.39,1507.87 v1@1225.39,1508.86
  other v1: 1217.52,1506.89
D5: IC5.E3 IC6.10 IC11.42 | length 728.4
  Top Layer w5: v1@1270.6,1485.59 1329.87,1544.86 1430.74,1544.86 1434.06,1548.17 IC6.10@1480.65,1548.17 ; IC6.10@1469.56,1548.17 IC6.10@1480.65,1548.17 ; IC6.10@1480.65,1548.17 IC6.10@1480.65,1548.17
  Top Layer w8: IC5.E3@1132.85,1258.87 v2(1148.6,1274.61)
  MidLayer1 w5: v1@1106.3,1475.39 1178.4,1475.39 1186.73,1467.07 1252.08,1467.07 v1@1270.6,1485.59
  Bottom Layer w5: v1(1105.31,1476.38) 1120.08,1476.38 1146.65,1449.8 1146.65,1447.83 ; 1146.84,1447.83 1146.84,1376.77 1150.41,1373.2 1150.41,1347.26 1148.6,1345.45 v2(1148.6,1274.61) ; v1@1270.6,1485.59 1278.36,1493.35 IC11.42@1321.22,1493.35
  other v1: 1270.67,1485.24
D6: IC5.C1 IC6.11 IC11.43 | length 859.4
  Top Layer w5: IC5.C1@1195.85,1321.86 1196.75,1322.76 1196.75,1455.07 1200.79,1459.11 v1@1200.79,1491.14 ; IC6.11@1480.65,1516.68 IC6.11@1480.65,1516.68 1564.03,1516.68 v1(1630.91,1449.8)
  Bottom Layer w5: v1(1194.81,1486.57) 1215.64,1465.74 1290.01,1465.74 1297.24,1472.98 1320.53,1472.98 IC11.43@1321.22,1473.66 1372.8,1473.66 1441.93,1404.53 1506.89,1404.53 ; 1508.86,1404.53 1506.89,1404.53 ; v1(1630.91,1449.8) 1601.38,1449.8 1593.32,1441.74 1593.32,1420.07 1577.77,1404.53 1506.89,1404.53
D7: IC5.E2 IC6.13 IC11.44 | length 1041.8
  Top Layer w5: IC5.E2@1132.85,1290.36 1116.73,1306.48 1116.73,1343.88 1111.41,1349.21 1111.41,1370.08 1155.31,1413.98 1155.31,1524.4 v1@1173.23,1542.32 ; IC6.13@1480.65,1453.69 IC6.13@1480.65,1453.69 1536.49,1453.69 1553.95,1436.23 1553.95,1420.44 1565.74,1408.65 1589.75,1408.65 1607.28,1426.18 v1@1611.22,1426.18 ; v1@1606.59,1428.85 1610.85,1428.85 v1(1612.82,1426.88)
  Bottom Layer w5: v1@1167.32,1540.35 1167.32,1525.59 1174.21,1518.7 1174.21,1478.81 1199.05,1453.98 IC11.44@1321.22,1453.98 1363.94,1453.98 1440.63,1377.29 1585.31,1377.29 1610.85,1402.83 1610.85,1428.85 v1(1612.82,1426.88)
  other v1: 1167.25,1540.71
D8: IC5.E4 IC6.42 | length 989.1
  Top Layer w5: v1(1843.5,1477.36) 1865.16,1477.36 1888.83,1453.69 IC6.42@1943.64,1453.69
  Top Layer w8: IC5.E4@1132.85,1227.37 v2(1148.6,1243.12)
  MidLayer1 w5: v1(1216.46,1377.31) 1288.9,1377.31 1350.34,1438.75 1463.03,1438.75 1494.53,1407.26 1620.77,1407.26 1643.01,1429.49 1755.74,1429.49 1764.8,1438.54 1790.41,1438.54 1800.3,1448.44 1814.58,1448.44 v1(1843.5,1477.36)
  Bottom Layer w5: v2(1148.6,1243.12) 1164.1,1258.62 1164.1,1324.95 v1(1216.46,1377.31)
D9: IC5.F3 IC6.44 | length 1084
  Top Layer w5: v1(1727.31,1534.8) 1729.47,1532.65 1792.48,1532.65 1808.45,1516.68 IC6.44@1943.64,1516.68
  Top Layer w8: IC5.F3@1101.36,1258.87 v2(1117.11,1274.61)
  MidLayer1 w5: v1(1119.41,1449.47) 1127.02,1457.07 1269.66,1457.07 1290.1,1477.51 1290.1,1493.96 1308.07,1511.93 1556.34,1511.93 1573.72,1529.3 1721.82,1529.3 v1(1727.31,1534.8)
  Bottom Layer w5: v2(1117.11,1274.61) 1117.13,1343.49 1111.41,1349.21 1111.41,1388.97 1124.82,1402.37 1124.82,1444.06 v1(1119.41,1449.47)
D10: IC5.D1 IC6.45 | length 920.6
  Top Layer w5: IC5.D1@1164.35,1321.86 1164.35,1381.31 v1(1167.25,1384.2) ; v1(1859.25,1536.42) 1882.93,1536.42 1894.68,1548.17 IC6.45@1943.64,1548.17
  MidLayer1 w5: v1(1167.25,1384.2) 1180.11,1397.07 1294.51,1397.07 1349.37,1451.93 1605.45,1451.93 1622.83,1469.3 1646.37,1469.3 1651.14,1464.53 1802.13,1464.53 1847.44,1509.84 ; 1847.44,1509.72 1847.44,1509.84 ; v1(1859.25,1536.42) 1847.44,1524.61 1847.44,1509.84
D11: IC5.F4 IC6.47 | length 1170.8
  Top Layer w5: v1@1883.7,1611.17 IC6.47@1943.64,1611.17
  Top Layer w8: IC5.F4@1101.36,1227.37 v2(1117.11,1243.12)
  MidLayer1 w5: v2(1117.11,1243.12) 1117.11,1246.27 1120.95,1250.11 1127.26,1250.11 1136.26,1259.11 1155.02,1259.11 1186.32,1290.41 1293.07,1290.41 1329.59,1326.93 1329.59,1360.27 1368.07,1398.75 1446.46,1398.75 1477.96,1367.26 1637.34,1367.26 1659.57,1389.49 1772.31,1389.49 1781.37,1398.54 1806.97,1398.54 1816.87,1408.44 1844.58,1408.44 1908.75,1472.61 1908.75,1576.24 1884.84,1600.15 1884.84,1615.16 v1(1884.84,1613.19)
D12: IC5.F5 IC6.48 | length 1281.4
  Top Layer w5: v1(1892.72,1672.24) 1892.72,1648.62 1898.68,1642.66 IC6.48@1943.64,1642.66 IC6.48@1941.73,1644.57
  Top Layer w8: IC5.F5@1101.36,1195.87 v2(1117.11,1211.62)
  MidLayer1 w5: v2(1117.11,1211.62) 1133.1,1227.62 1186.52,1227.62 1196.1,1237.19 1196.1,1249.54 1205.17,1258.62 1282.24,1258.62 1339.59,1315.97 1339.59,1356.13 1372.21,1388.75 1442.32,1388.75 1473.82,1357.26 1641.48,1357.26 1663.72,1379.49 1776.45,1379.49 1785.51,1388.54 1838.83,1388.54 1918.75,1468.46 1918.75,1646.21 v1(1892.72,1672.24)
D13: IC5.F2 IC6.50 | length 1182.6
  Top Layer w5: IC5.F2@1101.36,1290.36 1086.98,1304.74 1086.98,1370.45 1106.3,1389.76 v1@1106.3,1421.26 ; v1(1105.32,1422.24) v1@1106.3,1421.26 ; v1@1106.3,1423.23 v1@1106.3,1421.26 ; v1(1827.76,1707.68) 1870.96,1707.68 1872.98,1705.66 IC6.50@1943.64,1705.66 IC6.50@1943.64,1705.66
  MidLayer1 w5: v1(1105.32,1422.24) 1119.77,1422.24 1144.6,1447.07 1273.8,1447.07 1300.1,1473.37 1300.1,1489.81 1312.21,1501.93 1560.48,1501.93 1577.86,1519.3 1667.08,1519.3 1671.08,1515.3 1735.39,1515.3 1752.95,1532.86 1752.95,1559.04 1772.96,1579.05 1782.15,1579.05 1812.17,1609.06 1812.17,1692.09 v1(1827.76,1707.68)
D14: IC5.G4 IC6.51 | length 1332.2
  Top Layer w5: v1(1875,1737.2) IC6.51@1943.64,1737.15 IC6.51@1943.64,1737.15
  Top Layer w8: IC5.G4@1069.86,1227.37 1083.97,1241.48 v2(1085.55,1241.48)
  MidLayer1 w5: v2(1085.55,1241.48) 1088.7,1241.48 1106.33,1259.11 1123.53,1259.11 1132.87,1268.46 1132.87,1280.81 1152.48,1300.41 1288.93,1300.41 1319.59,1331.08 1319.59,1364.42 1363.93,1408.75 1450.6,1408.75 1482.1,1377.26 1633.2,1377.26 1655.43,1399.49 1768.17,1399.49 1777.22,1408.54 1802.83,1408.54 1812.72,1418.44 1840.44,1418.44 1898.75,1476.75 1898.75,1572.1 1877.17,1593.69 1876.76,1593.69 1865.34,1605.11 1865.34,1623.23 1867.26,1625.15 1867.26,1729.46 v1(1875,1737.2)
D15: IC5.E1 IC6.53 | length 1203.5
  Top Layer w5: v1(1130.91,1357.28) 1132.85,1355.33 IC5.E1@1132.85,1321.86 ; v1(1847.44,1800.2) 1888.78,1800.2 1888.83,1800.14 IC6.53@1943.64,1800.14
  MidLayer1 w5: v1(1130.91,1357.28) 1130.91,1375.44 1162.54,1407.07 1290.37,1407.07 1345.23,1461.93 1577.05,1461.93 1594.43,1479.3 1650.51,1479.3 1654.51,1475.3 1788.28,1475.3 1829.91,1516.93 1829.91,1682.25 1847.26,1699.6 1847.26,1723.23 1845.5,1724.99 1845.5,1798.26 v1(1847.44,1800.2)